# Altium PCB ATMEGA8精品开发板.PcbDoc (part 1 of 2)
Units mm, origin at the board's own origin, x right, y up, seen from the top; angles counter-clockwise.
Board outline 152.4 x 101.6 mm, 2 copper layers (Top Layer, Bottom Layer); 39 components, 43 nets, 177 pads, 0 vias.
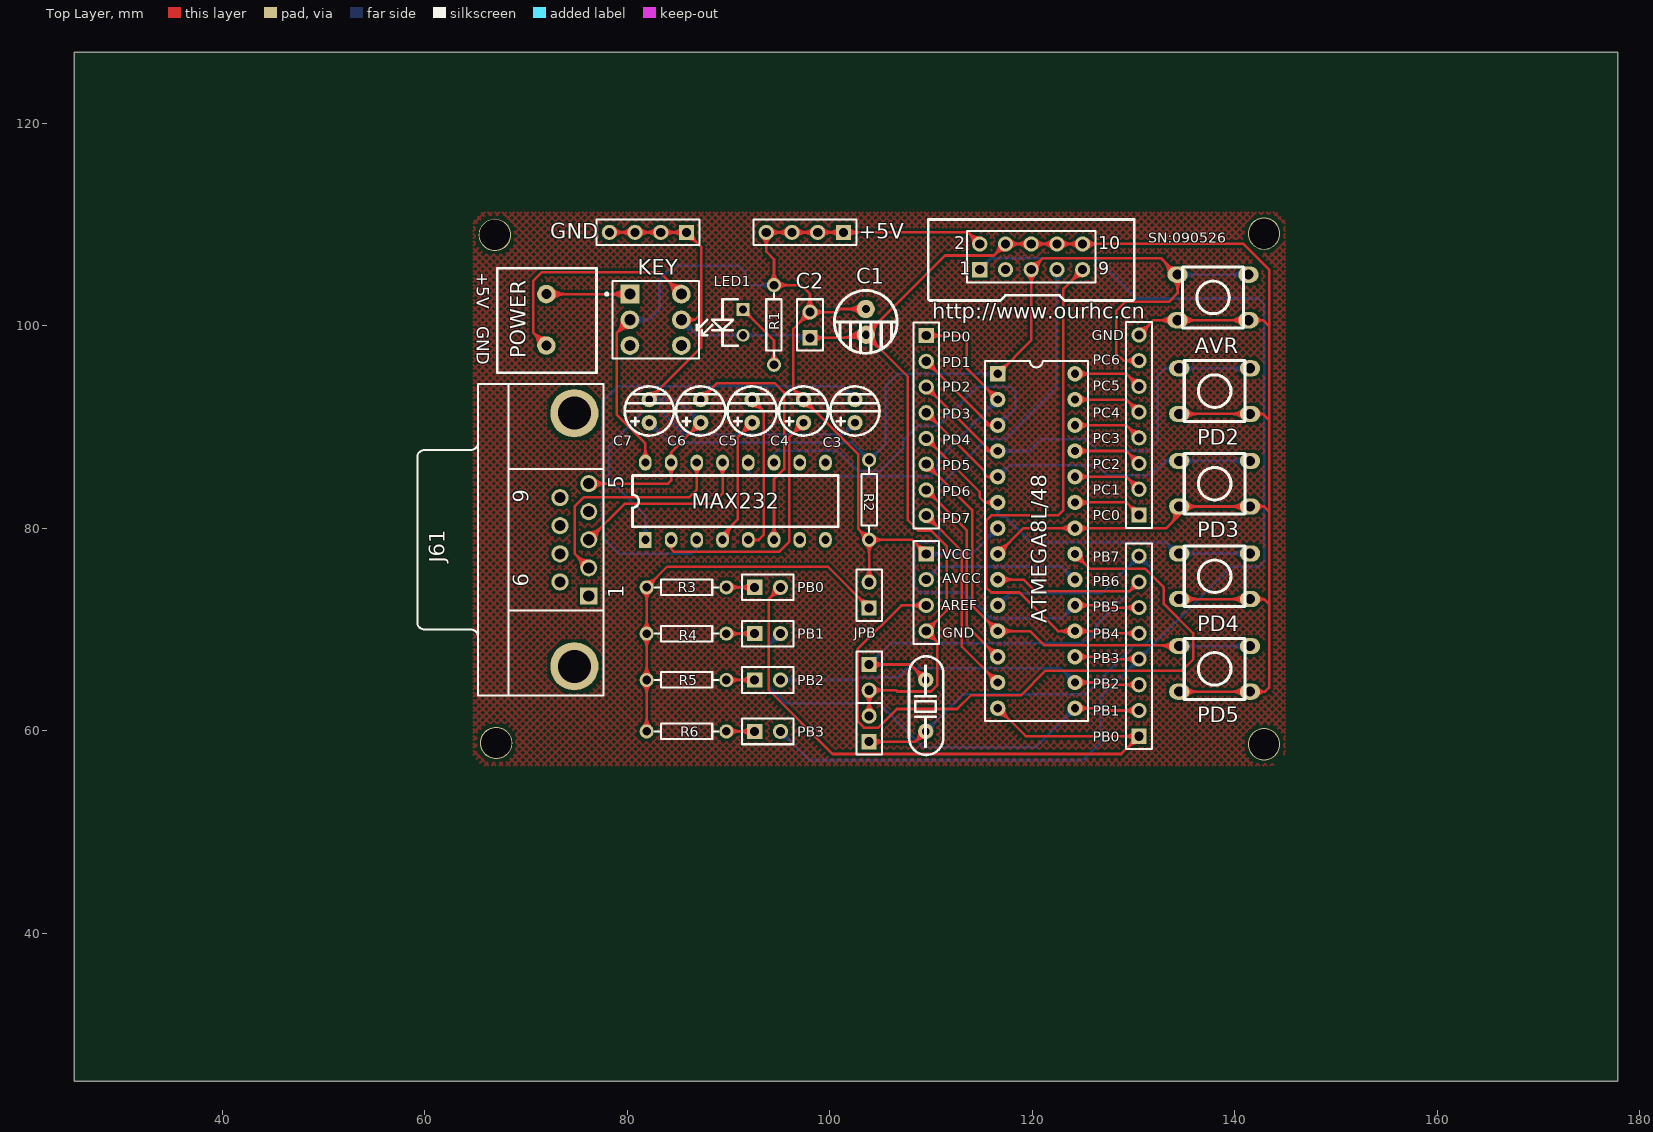
[diagram p0: Top Layer view]
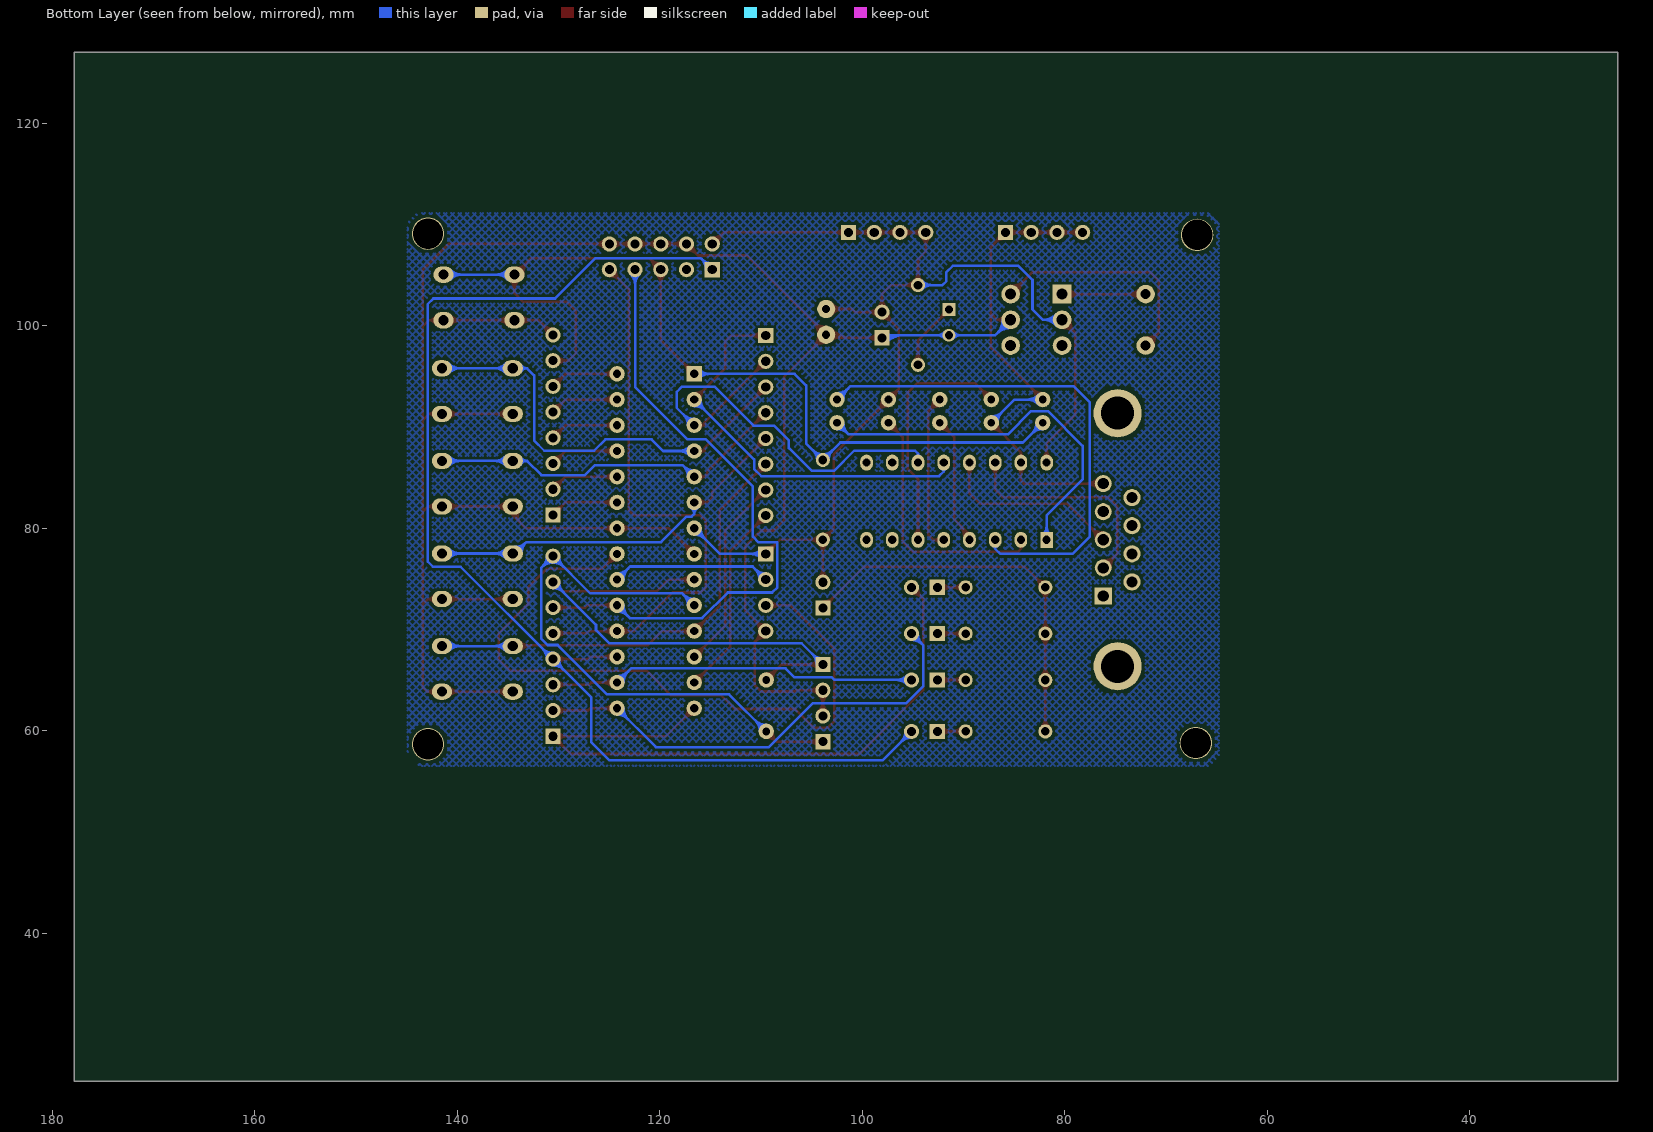
[diagram p1: Bottom Layer view, seen from below]

## Layer stack, top to bottom
Top Layer: signal copper 0.0356
Dielectric: dielectric 0.32, FR-4, Dk 4.8
Bottom Layer: signal copper 0.0356

## Board outline
25.4,25.4 177.8,25.4 177.8,127 25.4,127

## Design rules (kind name [scope] priority, off if disabled: settings)
Clearance [All] p1: gap=0.254
ComponentClearance [All] p1: gap=0.254 collisioncheckmode=3 verticalgap=0.254
PolygonConnect [All] p1: connectstyle=Relief reliefconductorwidth=0.254 reliefentries=4 polygonreliefangle="90 Angle"
RoutingVias [All] p1: holewidth=0.711 width=1.27 viastyle="Through Hole" minholewidth=0.711 minwidth=1.27 maxholewidth=0.711 maxwidth=1.27
SolderMaskExpansion [All] p1: expansion=0.102
TestPointUsage [All] p1: valid=0 allowmultiple=FALSE
Testpoint [All] p1: side=15 testpointundercomponent=TRUE minsize=1.016 maxsize=2.54 preferedsize=1.524 minholesize=0 maxholesize=1.016 preferedholesize=0.813 testpointgrid=0.025 style=1023 order=0123456789
Width [All] p1: maxlimit=0.254 minlimit=0.254 preferedwidth=0.254
17 further rules are at their usual default settings.

## Classes and differential pairs
component class ATMEGA8精品开发板: +5V AVR C1 C2 C3 C4 C5 C6 C7 JPB

## Components (designator, comment, footprint, x,y, rotation, side; value= is the part's Value field where it differs from the comment)
+5V "" HDR1X4 101.346,109.22 r180 top
ATMEGA8L/48 "ATmega8" 底座DIP-28/引脚7.62mm 120.396,78.74 r270 top (schematic designator U1)
AVR "" an-6*6 144.018,97.663 r0 top
C1 "100uF\25v" C-DJ-6 103.632,99.06 r270 top
C2 "CPDR" CPDR 98.044,100.076 r90 top
C3 "10uf" C-DJ-4 105.029,92.837 r90 top
C4 "10uf" C-DJ-4 99.949,92.837 r90 top
C5 "10uf" C-DJ-4 94.869,92.837 r90 top
C6 "10uf" C-DJ-4 89.789,92.837 r90 top
C7 "10uf" C-DJ-4 84.709,92.837 r90 top
CX1 "30p" HDR1X2 103.886,58.928 r90 top
CX2 "30p" HDR1X2 103.886,66.548 r270 top
GND "" HDR1X4 85.852,109.22 r180 top
J61 "D Connector 9" DSUB1.385-2H9 65.278,78.867 r90 top
JPB "" HDR1X2 103.886,72.136 r90 top (schematic designator JPB0~B3)
KEY "SW-DPST" DPDT-6 82.804,100.584 r0 top
LED1 "LED" LED 90.932,99.568 r90 top
MAX232 "MAX232" DIP16 81.788,78.867 r90 top (schematic designator U2)
PB "" HDR-8 130.556,72.136 r90 top
PB0 "LED" HDR1X2 92.583,74.168 r0 top
PB1 "LED" HDR1X2 92.583,69.596 r0 top
PB2 "LED" HDR1X2 92.583,65.024 r0 top
PB3 "LED" HDR1X2 92.583,59.944 r0 top
PC "" HDR-8 130.556,93.98 r90 top
PD "" HDR-8 109.503,86.36 r270 top
PD2 "key1" an-6*6 131.826,98.679 r180 top
PD3 "key2" an-6*6 131.826,89.535 r180 top
PD4 "key3" an-6*6 131.826,80.391 r180 top
PD5 "key4" an-6*6 131.826,71.247 r180 top
POWER "" JK128 73.152,102.616 r0 top
Px "" HDR-4 108.204,71.12 r270 top
R1 "4.7k" RSE 94.488,100.076 r270 top
R2 "10k" RSE 103.886,82.804 r270 top
R3 "470" RSE 85.852,74.168 r0 top
R4 "470" RSE 85.852,69.596 r0 top
R5 "470" RSE 85.852,65.024 r0 top
R6 "470" RSE 85.852,59.944 r0 top
Y "Y" JZ_ZC 109.474,65.024 r90 top
? "Download" HDR-2x5 119.888,105.664 r0 top

## Footprints (in the part's own frame and the unit in brackets; to place one, negate y for a bottom-side part, rotate by r counter-clockwise, add the part's x,y. Pads: shape width x height; smd on the part's side, far side on the other; paste and mask are expansions set on the pad)
an-6*6 [mm] "按键"
  oval 2x1.6 hole 1: 1(-9.675,7.381) 1(-2.675,7.381) 2(-9.675,2.881) 2(-2.675,2.881)
  silkscreen extent -9.17,2.13 -3.17,8.13
C-DJ-4 [mil]
  round 60 hole 30: 1(-95,100) 2(-5,100)
  silkscreen extent -145,4 46,195
C-DJ-6 [mm]
  round 1.8 hole 0.8: 1(-2.591,-0.076) 2(-0.051,-0.076)
  silkscreen extent -4.42,-3.18 1.78,3.02
CPDR [mm] "瓷片电容"
  rect 1.5x1.5 hole 0.9: 1(-1.27,0)
  round 1.5 hole 0.9: 2(1.27,0)
  silkscreen extent -2.54,-1.27 2.54,1.27
DIP16 [mil]
  rect 62x49.21 hole 32: 1(-0.15,-0.04)
  oval 62x49.21 hole 32: 2(-0.15,-100.04) 3(-0.15,-200.04) 4(-0.15,-300.04) 5(-0.15,-400.04) 6(-0.15,-500.04) 7(-0.15,-600.04) 8(-0.15,-700.04) 9(299.85,-700.04) 10(299.85,-600.04) 11(299.85,-500.04) 12(299.85,-400.04) 13(299.85,-300.04) 14(299.85,-200.04) 15(299.85,-100.04) 16(299.85,-0.04)
  silkscreen extent 50,-750 250,50
DPDT-6 [mm] "Double-Pole, Double-Throw Switch; 6 Leads"
  rect 1.85x1.85 hole 1.1: 1(-2.54,2.54)
  round 1.85 hole 1.1: 2(-2.54,0) 3(-2.54,-2.54) 4(2.54,-2.54) 5(2.54,0) 6(2.54,2.54)
  silkscreen extent -4.96,-3.81 4.28,3.81
DSUB1.385-2H9 [mm] "Connector; D Subminiature; 9 Position; Right Angle; Pitch 1.385 mm"
  rect 1.69x1.69 hole 1.09: 1(-5.54,-10.92)
  round 1.69 hole 1.09: 2(-2.77,-10.92) 3(0,-10.92) 4(2.77,-10.92) 5(5.54,-10.92) 6(-4.155,-8.08) 7(-1.385,-8.08) 8(1.385,-8.08) 9(4.155,-8.08)
  round 4.76 hole 3.26: 10(-12.495,-9.5) 11(12.495,-9.5)
  silkscreen extent -15.4,-12.4 15.4,6
HDR1X2 [mm] "Connector; Header; 2 Position"
  rect 1.5x1.5 hole 0.9: 1(0,0)
  round 1.5 hole 0.9: 2(2.54,0)
  silkscreen extent -1.27,-1.27 3.81,1.27
HDR1X4 [mm] "Connector; Header; 4 Position"
  rect 1.5x1.5 hole 0.9: 1(0,0)
  round 1.5 hole 0.9: 2(2.54,0) 3(5.08,0) 4(7.62,0)
  silkscreen extent -1.27,-1.27 8.89,1.27
HDR-2x5 [mm]
  rect 1.5x1.5 hole 0.9: 1(-5.08,-0.127)
  round 1.5 hole 0.9: 2(-5.08,2.413) 3(-2.54,-0.127) 4(-2.54,2.413) 5(0,-0.127) 6(0,2.413) 7(2.54,-0.127) 8(2.54,2.413) 9(5.08,-0.127) 10(5.08,2.413)
  silkscreen extent -10.16,-3.17 10.16,4.83
HDR-4 [mm]
  rect 1.5x1.5 hole 0.9: 1(-6.35,1.322)
  round 1.5 hole 0.9: 2(-3.81,1.322) 3(-1.27,1.322) 4(1.27,1.322)
  silkscreen extent -7.62,0.05 2.54,2.59
HDR-8 [mm]
  rect 1.5x1.5 hole 0.9: 1(-12.669,0.023)
  round 1.5 hole 0.9: 2(-10.129,0.023) 3(-7.589,0.023) 4(-5.049,0.023) 5(-2.509,0.023) 6(0.031,0.023) 7(2.571,0.023) 8(5.111,0.023)
  silkscreen extent -13.94,-1.25 6.38,1.29
JK128 [mil]
  round 71.81 hole 39.37: 1(-45,20) 2(-45,-180)
  silkscreen extent -235,-285 150,120
JZ_ZC [mil] "晶振"
  round 60 hole 30: 1(-200,0) 2(0,0)
  silkscreen extent -292,-68 92,65
LED [mil]
  rect 50x50 hole 32: 1(80,-20)
  round 50 hole 32: 2(-20,-20)
  silkscreen extent -60,0 120,160
RSE [mm] "直插电阻1/8W"
  round 1.4 hole 0.85: 1(-3.937,0) 2(3.937,0)
  silkscreen extent -3.17,-0.76 3.17,0.76
底座DIP-28/引脚7.62mm [mil] "引脚跨度 ：300 Mil ，主体外形 10.1×35.5mm（400×1400Mil）"
  rect 60x60 hole 32: 1(-650,-150)
  round 60 hole 32: 2(-550,-150) 3(-450,-150) 4(-350,-150) 5(-250,-150) 6(-150,-150) 7(-50,-150) 8(50,-150) 9(150,-150) 10(250,-150) 11(350,-150) 12(450,-150) 13(550,-150) 14(650,-150) 15(650,150) 16(550,150) 17(450,150) 18(350,150) 19(250,150) 20(150,150) 21(50,150) 22(-50,150) 23(-150,150) 24(-250,150) 25(-350,150) 26(-450,150) 27(-550,150) 28(-650,150)
  silkscreen extent -700,-200 700,200

## Part data
+5V GND: library part "Header 4", "Header, 4-Pin"
ATMEGA8L/48: library part ATmega8-P, "8 位微处理器/28引脚"
AVR: library part SW-PB, "Switch"
C1 C3 C4 C5 C6 C7: library part "CAPACITOR POL", "Capacitor"
C2: "瓷片电容"
CX1 CX2: library part CAP, "Capacitor"
J61: "Receptacle Assembly, 9 Position, Right Angle"
JPB POWER: library part "Header 2", "Header, 2-Pin"
KEY: "Double-Pole, Single-Throw Switch"
PB PC PD: library part PZ_8, "排针——8"
PD2 PD3 PD4 PD5: library part key
Px: library part PZ_4, "排针——4"
R1 R2 R3 R4 R5 R6: library part RES2
Y: library part CRYSTAL, "Crystal"
?: library part "Header 5X2", "Header, 5-Pin, Dual row"

## Free pads (board coordinates)
  round 3.2 hole 3: 0(66.929,108.966) 0(67.056,58.801) 0(142.875,58.674) 0(142.875,109.093)

## Nets (pads, with @x,y where several pads share a name; then routed paths per layer and width w, separated by ;. In a path a pad name is that pad's centre, name@x,y a point inside that pad or via, vN(x,y) a via of type N, cw(c..) or ccw(c..) an arc to the next point about the centre after c; other vN are vias at no path point)
AREF: ATMEGA8L/48.21 Px.3 | length 78
  Top Layer w0.254: Px.3@109.085,71.949 ccw(c108.022,70.886) 108.022,72.39 ccw(c108.022,73.894) Px.3@109.085,72.831 ; Px.3@109.265,72.129 ccw(c108.635,71.499) 108.635,72.39 ccw(c108.635,73.281) Px.3@109.265,72.651 ; Px.3@109.526,72.39 107.061,72.39 102.743,68.072 102.743,60.96 103.378,60.325 104.8,60.325 106.629,62.154 112.573,62.154 113.919,63.5 118.872,63.5 121.31,65.938 134.772,65.938 135.89,67.056 135.89,69.621 132.994,72.517 132.994,74.168 131.166,75.997 125.679,75.997 ATMEGA8L/48.21@124.206,77.47 ; ATMEGA8L/48.21@124.206,76.835 cw(c124.206,75.302) 125.29,76.386 cw(c126.374,77.47) ATMEGA8L/48.21@124.841,77.47 ; ATMEGA8L/48.21@124.206,77.089 cw(c124.206,76.169) 124.856,76.82 cw(c125.507,77.47) ATMEGA8L/48.21@124.587,77.47
AVCC: ATMEGA8L/48.20 Px.2 | length 23.4
  Bottom Layer w0.254: Px.2@109.526,74.93 110.821,76.225 122.911,76.225 ATMEGA8L/48.20@124.206,74.93 ; Px.2@109.526,75.299 ccw(c109.526,76.19) 110.156,75.56 ccw(c110.786,74.93) Px.2@109.895,74.93 ; Px.2@109.526,75.553 ccw(c109.526,77.057) 110.59,75.994 ccw(c111.653,74.93) Px.2@110.149,74.93 ; ATMEGA8L/48.20@123.571,74.93 ccw(c122.038,74.93) 123.122,76.014 ccw(c124.206,77.098) ATMEGA8L/48.20@124.206,75.565 ; ATMEGA8L/48.20@123.825,74.93 ccw(c122.905,74.93) 123.556,75.58 ccw(c124.206,76.231) ATMEGA8L/48.20@124.206,75.311
GND: ?.4 ?.6 ?.8 ?.10 ATMEGA8L/48.8 ATMEGA8L/48.22 AVR.2 C1.2 C2.1 C6.1 C7.2 CX1.2 CX2.2 GND.1 GND.2 GND.3 GND.4 J61.5 KEY.5 LED1.2 MAX232.15 PC.8 PD2.1 PD3.1 PD4.1 PD5.1 Px.4 | length 484
  Top Layer w0.254: J61.5@76.198,84.407 84.026,84.407 84.329,84.71 MAX232.15@84.329,86.483 84.329,87.504 ; J61.5@76.526,84.079 cw(c77.318,83.287) 77.318,84.407 cw(c77.318,85.527) J61.5@76.526,84.735 ; J61.5@76.706,83.899 cw(c77.931,82.674) 77.931,84.407 cw(c77.931,86.14) J61.5@76.706,84.915 ; GND.4@78.232,109.22 GND.3@80.772,109.22 GND.2@83.312,109.22 GND.1@85.852,109.22 87.3,107.772 87.3,97.841 C7.2@82.169,92.71 ; GND.4@78.493,108.959 cw(c79.123,108.329) 79.123,109.22 cw(c79.123,110.111) GND.4@78.493,109.481 ; GND.4@78.673,108.779 cw(c79.736,107.716) 79.736,109.22 cw(c79.736,110.724) GND.4@78.673,109.661 ; GND.3@80.331,108.779 ccw(c79.268,107.716) 79.268,109.22 ccw(c79.268,110.724) GND.3@80.331,109.661 ; GND.3@80.511,108.959 ccw(c79.881,108.329) 79.881,109.22 ccw(c79.881,110.111) GND.3@80.511,109.481 ; GND.3@81.033,108.959 cw(c81.663,108.329) 81.663,109.22 cw(c81.663,110.111) GND.3@81.033,109.481 ; GND.3@81.213,108.779 cw(c82.276,107.716) 82.276,109.22 cw(c82.276,110.724) GND.3@81.213,109.661 ; C7.2@82.169,93.091 ccw(c82.169,94.011) 82.819,93.36 ccw(c83.47,92.71) C7.2@82.55,92.71 ; C7.2@82.169,93.345 ccw(c82.169,94.878) 83.253,93.794 ccw(c84.337,92.71) C7.2@82.804,92.71 ; GND.2@82.871,108.779 ccw(c81.808,107.716) 81.808,109.22 ccw(c81.808,110.724) GND.2@82.871,109.661 ; GND.2@83.051,108.959 ccw(c82.421,108.329) 82.421,109.22 ccw(c82.421,110.111) GND.2@83.051,109.481 ; GND.2@83.573,108.959 cw(c84.203,108.329) 84.203,109.22 cw(c84.203,110.111) GND.2@83.573,109.481 ; GND.2@83.753,108.779 cw(c84.816,107.716) 84.816,109.22 cw(c84.816,110.724) GND.2@83.753,109.661 ; MAX232.15@83.977,85.969 cw(c83.127,85.119) 84.329,85.119 cw(c85.531,85.119) MAX232.15@84.681,85.969 ; MAX232.15@84.082,87.078 ccw(c83.838,87.504) 84.329,87.504 ; MAX232.15@84.576,87.078 cw(c84.82,87.504) 84.329,87.504 ; KEY.5@85.344,100.584 86.665,100.584 ; GND.1@85.411,108.779 ccw(c84.348,107.716) 84.348,109.22 ccw(c84.348,110.724) GND.1@85.411,109.661 ; GND.1@85.591,108.959 ccw(c84.961,108.329) 84.961,109.22 ccw(c84.961,110.111) GND.1@85.591,109.481 ; GND.1@85.852,108.597 cw(c85.852,107.093) 86.916,108.156 cw(c87.979,109.22) GND.1@86.475,109.22 ; GND.1@85.852,108.851 cw(c85.852,107.96) 86.482,108.59 cw(c87.112,109.22) GND.1@86.221,109.22 ; KEY.5@86.05,100.213 cw(c86.665,99.89) 86.665,100.584 ; KEY.5@86.05,100.955 ccw(c86.665,101.278) 86.665,100.584 ; C6.1@86.614,90.424 cw(c85.081,90.424) 86.165,89.34 cw(c87.249,88.256) C6.1@87.249,89.789 ; C6.1@86.868,90.424 cw(c85.948,90.424) 86.599,89.774 cw(c87.249,89.123) C6.1@87.249,90.043 ; C6.1@87.249,90.424 84.329,87.504 ; 87.3,101.219 86.665,100.584 ; C2.1@98.044,98.806 103.251,98.806 111.379,106.934 116.205,106.934 ?.4@117.348,108.077 ?.6@119.888,108.077 ?.8@122.428,108.077 ?.10@124.968,108.077 140.843,108.077 143.383,105.537 143.383,99.949 ; C2.1@98.305,98.545 cw(c98.935,97.915) 98.935,98.806 cw(c98.935,99.697) C2.1@98.305,99.067 ; C2.1@98.485,98.365 cw(c99.548,97.302) 99.548,98.806 cw(c99.548,100.31) C2.1@98.485,99.247 ; 100.954,98.806 ccw(c100.954,101.713) C1.2@103.009,99.657 ; 101.567,98.806 ccw(c101.567,101.1) C1.2@103.189,99.478 ; 102.18,98.806 ccw(c102.18,100.486) C1.2@103.368,99.298 ; 102.425,98.806 cw(c102.425,97.98) C1.2@103.009,98.564 ; CX1.2@103.445,61.909 ccw(c102.382,62.972) 103.886,62.972 ccw(c105.39,62.972) CX1.2@104.327,61.909 ; CX2.2@103.445,63.567 cw(c102.382,62.504) 103.886,62.504 cw(c105.39,62.504) 104.327,63.567 cw(c105.39,62.504) 105.39,64.008 cw(c105.39,65.512) CX2.2@104.327,64.449 ; C1.2@103.556,98.338 cw(c103.556,96.472) 104.875,97.791 cw(c106.195,99.111) 104.329,99.111 cw(c106.195,99.111) 104.875,100.43 cw(c103.556,101.75) C1.2@103.556,99.884 ; C1.2@103.556,98.592 cw(c103.556,97.339) 104.442,98.225 cw(c105.328,99.111) 104.075,99.111 cw(c105.328,99.111) 104.442,99.997 cw(c103.556,100.883) C1.2@103.556,99.63 ; C1.2@103.556,99.111 107.696,94.971 107.696,80.797 108.712,79.781 109.982,79.781 111.531,78.232 111.531,71.855 Px.4@109.526,69.85 110.617,68.759 110.617,64.516 109.982,63.881 106.68,63.881 106.553,64.008 CX2.2@103.886,64.008 CX1.2@103.886,61.468 ; CX1.2@103.625,61.729 ccw(c102.995,62.359) 103.886,62.359 ccw(c104.777,62.359) CX1.2@104.147,61.729 ; CX2.2@103.625,63.747 cw(c102.995,63.117) 103.886,63.117 cw(c104.777,63.117) 104.147,63.747 cw(c104.777,63.117) 104.777,64.008 cw(c104.777,64.899) CX2.2@104.147,64.269 ; Px.4@109.526,69.227 cw(c109.526,67.723) 110.59,68.786 cw(c111.653,69.85) 110.149,69.85 cw(c111.653,69.85) 110.59,70.914 cw(c109.526,71.977) Px.4@109.526,70.473 ; Px.4@109.526,69.481 cw(c109.526,68.59) 110.156,69.22 cw(c110.786,69.85) 109.895,69.85 cw(c110.786,69.85) 110.156,70.48 cw(c109.526,71.11) Px.4@109.526,70.219 ; ATMEGA8L/48.8@116.586,77.47 119.126,80.01 ATMEGA8L/48.22@124.206,80.01 133.231,80.01 134.501,81.28 ; ATMEGA8L/48.8@116.586,77.851 ccw(c116.586,78.771) 117.236,78.12 ccw(c117.887,77.47) ATMEGA8L/48.8@116.967,77.47 ; ATMEGA8L/48.8@116.586,78.105 ccw(c116.586,79.638) 117.67,78.554 ccw(c118.754,77.47) ATMEGA8L/48.8@117.221,77.47 ; ?.4@116.725,108.077 cw(c115.221,108.077) 116.284,107.013 cw(c117.348,105.95) ?.4@117.348,107.454 ; ?.4@116.979,108.077 cw(c116.088,108.077) 116.718,107.447 cw(c117.348,106.817) ?.4@117.348,107.708 ; ?.4@117.609,107.816 cw(c118.239,107.186) 118.239,108.077 cw(c118.239,108.968) ?.4@117.609,108.338 ; ?.4@117.789,107.636 cw(c118.852,106.573) 118.852,108.077 cw(c118.852,109.581) ?.4@117.789,108.518 ; ?.6@119.447,107.636 ccw(c118.384,106.573) 118.384,108.077 ccw(c118.384,109.581) ?.6@119.447,108.518 ; ?.6@119.627,107.816 ccw(c118.997,107.186) 118.997,108.077 ccw(c118.997,108.968) ?.6@119.627,108.338 ; ?.6@120.149,107.816 cw(c120.779,107.186) 120.779,108.077 cw(c120.779,108.968) ?.6@120.149,108.338 ; ?.6@120.329,107.636 cw(c121.392,106.573) 121.392,108.077 cw(c121.392,109.581) ?.6@120.329,108.518 ; ?.8@121.987,107.636 ccw(c120.924,106.573) 120.924,108.077 ccw(c120.924,109.581) ?.8@121.987,108.518 ; ?.8@122.167,107.816 ccw(c121.537,107.186) 121.537,108.077 ccw(c121.537,108.968) ?.8@122.167,108.338 ; ?.8@122.689,107.816 cw(c123.319,107.186) 123.319,108.077 cw(c123.319,108.968) ?.8@122.689,108.338 ; ?.8@122.869,107.636 cw(c123.932,106.573) 123.932,108.077 cw(c123.932,109.581) ?.8@122.869,108.518 ; ATMEGA8L/48.22@123.757,79.561 ccw(c122.673,78.477) 122.673,80.01 ccw(c122.673,81.543) ATMEGA8L/48.22@123.757,80.459 ; ATMEGA8L/48.22@123.937,79.741 ccw(c123.286,79.09) 123.286,80.01 ccw(c123.286,80.93) ATMEGA8L/48.22@123.937,80.279 ; ATMEGA8L/48.22@124.475,79.741 cw(c125.126,79.09) 125.126,80.01 cw(c125.126,80.93) ATMEGA8L/48.22@124.475,80.279 ; ?.10@124.527,107.636 ccw(c123.464,106.573) 123.464,108.077 ccw(c123.464,109.581) ?.10@124.527,108.518 ; ATMEGA8L/48.22@124.655,79.561 cw(c125.739,78.477) 125.739,80.01 cw(c125.739,81.543) ATMEGA8L/48.22@124.655,80.459 ; ?.10@124.707,107.816 ccw(c124.077,107.186) 124.077,108.077 ccw(c124.077,108.968) ?.10@124.707,108.338 ; ?.10@125.229,107.816 cw(c125.859,107.186) 125.859,108.077 cw(c125.859,108.968) ?.10@125.229,108.338 ; ?.10@125.409,107.636 cw(c126.472,106.573) 126.472,108.077 cw(c126.472,109.581) ?.10@125.409,108.518 ; PC.8@130.533,99.091 131.986,100.544 AVR.2@134.343,100.544 AVR.2@141.343,100.544 142.788,100.544 ; PC.8@130.533,99.46 ccw(c130.533,100.351) 131.163,99.721 ccw(c131.793,99.091) PC.8@130.902,99.091 ; PC.8@130.533,99.714 ccw(c130.533,101.218) 131.597,100.155 ccw(c132.66,99.091) PC.8@131.156,99.091 ; AVR.2@133.667,100.068 ccw(c132.518,98.919) 132.518,100.544 ccw(c132.518,102.169) AVR.2@133.667,101.02 ; 133.768,80.547 ccw(c133.172,81.143) PD3.1@133.8,81.705 ; AVR.2@133.847,100.248 ccw(c133.131,99.532) 133.131,100.544 ccw(c133.131,101.555) AVR.2@133.847,100.84 ; 133.958,80.737 ccw(c133.373,81.322) PD3.1@133.989,81.875 ; 134.148,80.927 ccw(c133.573,81.501) PD3.1@134.178,82.044 ; PD3.1@134.329,81.504 cw(c134.27,81.28) 134.501,81.28 ; 134.337,81.116 ccw(c133.773,81.681) PD3.1@134.367,82.214 ; PD5.1@134.501,63.866 PD5.1@141.501,63.866 142.987,63.866 ; PD4.1@134.501,73.01 PD4.1@141.501,73.01 142.89,73.01 ; PD2.1@134.501,91.298 PD2.1@141.501,91.298 142.763,91.298 ; 134.527,81.306 ccw(c133.973,81.86) PD3.1@134.556,82.383 ; PD3.1@134.673,81.504 ccw(c134.732,81.28) 134.501,81.28 ; AVR.2@134.839,100.248 cw(c135.555,99.532) 135.555,100.544 cw(c135.555,101.555) AVR.2@134.839,100.84 ; PD5.1@134.997,63.57 cw(c135.713,62.855) 135.713,63.866 cw(c135.713,64.878) PD5.1@134.997,64.162 ; PD4.1@134.997,72.714 cw(c135.713,71.999) 135.713,73.01 cw(c135.713,74.022) PD4.1@134.997,73.306 ; PD3.1@134.997,81.858 cw(c135.713,81.143) 135.713,82.154 cw(c135.713,83.166) PD3.1@134.997,82.45 ; PD2.1@134.997,91.002 cw(c135.713,90.287) 135.713,91.298 cw(c135.713,92.31) PD2.1@134.997,91.594 ; AVR.2@135.019,100.068 cw(c136.168,98.919) 136.168,100.544 cw(c136.168,102.169) AVR.2@135.019,101.02 ; PD5.1@135.177,63.39 cw(c136.326,62.241) 136.326,63.866 cw(c136.326,65.491) PD5.1@135.177,64.342 ; PD4.1@135.177,72.534 cw(c136.326,71.385) 136.326,73.01 cw(c136.326,74.635) PD4.1@135.177,73.486 ; PD3.1@135.177,81.678 cw(c136.326,80.529) 136.326,82.154 cw(c136.326,83.779) PD3.1@135.177,82.63 ; PD2.1@135.177,90.822 cw(c136.326,89.673) 136.326,91.298 cw(c136.326,92.923) PD2.1@135.177,91.774 ; AVR.2@140.667,100.068 ccw(c139.518,98.919) 139.518,100.544 ccw(c139.518,102.169) AVR.2@140.667,101.02 ; PD5.1@140.825,63.39 ccw(c139.676,62.241) 139.676,63.866 ccw(c139.676,65.491) PD5.1@140.825,64.342 ; PD4.1@140.825,72.534 ccw(c139.676,71.385) 139.676,73.01 ccw(c139.676,74.635) PD4.1@140.825,73.486 ; PD3.1@140.825,81.678 ccw(c139.676,80.529) 139.676,82.154 ccw(c139.676,83.779) PD3.1@140.825,82.63 ; PD2.1@140.825,90.822 ccw(c139.676,89.673) 139.676,91.298 ccw(c139.676,92.923) PD2.1@140.825,91.774 ; AVR.2@140.847,100.248 ccw(c140.131,99.532) 140.131,100.544 ccw(c140.131,101.555) AVR.2@140.847,100.84 ; PD5.1@141.005,63.57 ccw(c140.289,62.855) 140.289,63.866 ccw(c140.289,64.878) PD5.1@141.005,64.162 ; PD4.1@141.005,72.714 ccw(c140.289,71.999) 140.289,73.01 ccw(c140.289,74.022) PD4.1@141.005,73.306 ; PD3.1@141.005,81.858 ccw(c140.289,81.143) 140.289,82.154 ccw(c140.289,83.166) PD3.1@141.005,82.45 ; PD2.1@141.005,91.002 ccw(c140.289,90.287) 140.289,91.298 ccw(c140.289,92.31) PD2.1@141.005,91.594 ; PD5.1@142.045,63.627 cw(c142.502,63.311) 142.502,63.866 cw(c142.502,64.422) PD5.1@142.045,64.105 ; AVR.2@142.106,100.175 cw(c142.788,99.729) 142.788,100.544 ; AVR.2@142.106,100.912 ccw(c142.788,101.359) 142.788,100.544 ; PD5.1@142.254,63.483 cw(c142.987,62.974) 142.987,63.866 ; PD5.1@142.254,64.25 ccw(c142.987,64.759) 142.987,63.866 ; PD4.1@142.278,72.664 cw(c142.89,72.297) 142.89,73.01 ; PD4.1@142.278,73.357 ccw(c142.89,73.724) 142.89,73.01 ; PD3.1@142.278,81.808 cw(c142.89,81.441) 142.89,82.154 ; PD3.1@142.278,82.501 ccw(c142.89,82.868) 142.89,82.154 ; PD2.1@142.31,91.011 cw(c142.763,90.797) 142.763,91.298 ; PD2.1@142.31,91.585 ccw(c142.763,91.799) 142.763,91.298 ; 134.501,81.28 PD3.1@134.501,82.154 PD3.1@141.501,82.154 142.89,82.154 ; 142.763,91.298 143.383,90.678 ; 142.788,100.544 143.383,99.949 ; 142.89,73.01 143.383,72.517 ; 142.89,82.154 143.383,81.661 ; 142.987,63.866 143.383,64.262 143.383,72.517 ; 143.383,72.517 143.383,81.661 ; 143.383,81.661 143.383,90.678 ; 143.383,90.678 143.383,99.949
  Bottom Layer w0.254: C7.2@82.169,92.71 84.963,92.71 C6.1@87.249,90.424 ; C7.2@82.438,92.441 cw(c83.089,91.79) 83.089,92.71 cw(c83.089,93.63) C7.2@82.438,92.979 ; C7.2@82.618,92.261 cw(c83.702,91.177) 83.702,92.71 cw(c83.702,94.243) C7.2@82.618,93.159 ; KEY.5@85.344,99.786 cw(c85.344,97.859) 86.706,99.222 cw(c88.069,100.584) KEY.5@86.142,100.584 ; KEY.5@85.344,100.04 cw(c85.344,98.727) 86.273,99.655 cw(c87.201,100.584) KEY.5@85.888,100.584 ; KEY.5@85.344,100.584 86.868,99.06 LED1.2@91.44,99.06 97.79,99.06 C2.1@98.044,98.806 ; C6.1@86.614,90.424 ccw(c85.081,90.424) 86.165,91.508 ccw(c87.249,92.592) C6.1@87.249,91.059 ; C6.1@86.868,90.424 ccw(c85.948,90.424) 86.599,91.074 ccw(c87.249,91.725) C6.1@87.249,90.805 ; LED1.2@91.081,98.701 ccw(c90.214,97.834) 90.214,99.06 ccw(c90.214,100.286) LED1.2@91.081,99.419 ; LED1.2@91.799,98.701 cw(c92.666,97.834) 92.666,99.06 cw(c92.666,100.286) LED1.2@91.799,99.419 ; 95.927,99.06 cw(c95.927,96.689) C2.1@97.603,98.365 ; 96.54,99.06 cw(c96.54,97.302) C2.1@97.783,98.545 ; C2.1@97.603,99.247 cw(c97.153,99.697) 97.153,99.06 cw(c97.153,97.915) C2.1@97.963,98.725
NetC3_1: C3.1 MAX232.1 | length 43.6
  Bottom Layer w0.254: MAX232.1@81.437,79.378 ccw(c80.587,80.228) 81.789,80.228 ccw(c82.991,80.228) MAX232.1@82.141,79.378 ; MAX232.1@81.789,78.863 81.789,81.28 78.232,84.837 78.232,88.138 81.661,91.567 83.312,91.567 85.598,89.281 101.346,89.281 C3.1@102.489,90.424 ; C3.1@101.854,90.424 cw(c100.321,90.424) 101.405,89.34 cw(c102.489,88.256) C3.1@102.489,89.789 ; C3.1@102.108,90.424 cw(c101.188,90.424) 101.839,89.774 cw(c102.489,89.123) C3.1@102.489,90.043
NetC3_2: C3.2 MAX232.3 | length 55.1
  Bottom Layer w0.254: MAX232.3@86.692,78.235 cw(c86.595,77.979) 86.869,77.979 ; MAX232.3@86.869,78.863 86.869,77.979 ; MAX232.3@87.046,78.235 ccw(c87.143,77.979) 86.869,77.979 ; C3.2@101.854,92.71 ccw(c100.321,92.71) 101.405,93.794 ccw(c102.489,94.878) C3.2@102.489,93.345 ; C3.2@102.108,92.71 ccw(c101.188,92.71) 101.839,93.36 ccw(c102.489,94.011) C3.2@102.489,93.091 ; C3.2@102.489,92.71 101.194,94.005 79.096,94.005 77.546,92.456 77.546,79.146 79.223,77.47 86.36,77.47 86.869,77.979
NetC4_1: C4.1 MAX232.2 | length 30.6
  Top Layer w0.254: MAX232.2@84.329,78.863 84.329,77.978 ; C4.1@96.774,90.424 cw(c95.241,90.424) 96.325,89.34 cw(c97.409,88.256) C4.1@97.409,89.789 ; C4.1@97.028,90.424 cw(c96.108,90.424) 96.759,89.774 cw(c97.409,89.123) C4.1@97.409,90.043 ; C4.1@97.409,90.424 96.003,89.018 96.003,78.68 94.996,77.673 84.634,77.673 84.329,77.978 ; 84.329,77.978 cw(c84.604,77.978) 84.506,78.235 ccw(c84.604,77.978) 84.329,77.978 ; 84.329,77.978 ccw(c84.054,77.978) 84.152,78.235 cw(c84.054,77.978) 84.329,77.978
NetC5_1: C5.1 MAX232.4 | length 20.3
  Top Layer w0.254: MAX232.4@89.399,79.026 cw(c90.221,79.026) 89.64,79.607 ; MAX232.4@89.409,78.863 89.409,79.376 90.932,80.899 90.932,89.027 C5.1@92.329,90.424 ; MAX232.4@89.409,79.524 ccw(c89.409,79.88) 89.661,79.628 ; MAX232.4@89.653,79.026 cw(c91.088,79.026) 90.073,80.04 ; MAX232.4@89.907,79.026 cw(c91.955,79.026) 90.507,80.474 ; C5.1@91.694,90.424 cw(c90.161,90.424) 91.245,89.34 cw(c92.329,88.256) C5.1@92.329,89.789 ; C5.1@91.948,90.424 cw(c91.028,90.424) 91.679,89.774 cw(c92.329,89.123) C5.1@92.329,90.043
NetC5_2: C5.2 MAX232.5 | length 20.9
  Top Layer w0.254: MAX232.5@91.949,78.863 91.949,78.842 92.964,78.842 ; C5.2@92.329,92.075 cw(c92.329,90.542) 93.413,91.626 cw(c94.497,92.71) C5.2@92.964,92.71 ; C5.2@92.329,92.329 cw(c92.329,91.409) 92.979,92.06 cw(c93.63,92.71) C5.2@92.71,92.71 ; C5.2@92.329,92.71 93.472,91.567 93.472,79.35 92.964,78.842 ; MAX232.5@92.332,78.545 cw(c92.964,78.02) 92.964,78.842 ; MAX232.5@92.353,79.154 ccw(c92.964,79.595) 92.964,78.842
NetC6_2: C6.2 MAX232.6 | length 30
  Top Layer w0.254: C6.2@87.249,92.71 88.875,94.336 94.564,94.336 95.495,93.405 95.495,85.852 94.489,84.846 MAX232.6@94.489,78.863 ; C6.2@87.249,93.091 ccw(c87.249,94.011) 87.899,93.36 ccw(c88.55,92.71) C6.2@87.63,92.71 ; C6.2@87.249,93.345 ccw(c87.249,94.878) 88.333,93.794 ccw(c89.417,92.71) C6.2@87.884,92.71 ; MAX232.6@94.137,79.378 ccw(c93.287,80.228) 94.489,80.228 ccw(c95.691,80.228) MAX232.6@94.841,79.378
NetJ61_2: J61.2 MAX232.14 | length 28.4
  Top Layer w0.254: J61.2@75.48,76.097 ccw(c73.747,76.097) 74.972,77.323 ccw(c76.198,78.548) J61.2@76.198,76.815 ; J61.2@75.734,76.097 ccw(c74.614,76.097) 75.406,76.889 ccw(c76.198,77.681) J61.2@76.198,76.561 ; J61.2@76.198,76.097 74.803,77.492 74.803,82.169 75.692,83.058 86.106,83.058 86.869,83.821 MAX232.14@86.869,86.483 ; MAX232.14@86.517,85.969 cw(c85.667,85.119) 86.869,85.119 cw(c88.071,85.119) MAX232.14@87.221,85.969
NetJ61_3: J61.3 MAX232.13 | length 24.5
  Top Layer w0.254: J61.3@76.198,78.867 79.755,82.424 88.392,82.424 89.409,83.441 MAX232.13@89.409,86.483 ; J61.3@76.198,79.331 ccw(c76.198,80.451) 76.99,79.659 ccw(c77.782,78.867) J61.3@76.662,78.867 ; J61.3@76.198,79.585 ccw(c76.198,81.318) 77.424,80.093 ccw(c78.649,78.867) J61.3@76.916,78.867 ; MAX232.13@89.057,85.969 cw(c88.207,85.119) 89.409,85.119 cw(c90.611,85.119) MAX232.13@89.761,85.969
NetJPB0~B3_1: JPB.1 R3.1 R4.1 R5.1 R6.1 | length 66.2
  Top Layer w0.254: R6.1@81.51,60.349 ccw(c80.532,61.327) 81.915,61.327 ccw(c83.298,61.327) R6.1@82.32,60.349 ; R5.1@81.51,64.619 cw(c80.532,63.641) 81.915,63.641 cw(c83.298,63.641) R5.1@82.32,64.619 ; R5.1@81.51,65.429 ccw(c80.532,66.407) 81.915,66.407 ccw(c83.298,66.407) R5.1@82.32,65.429 ; R4.1@81.51,69.191 cw(c80.532,68.213) 81.915,68.213 cw(c83.298,68.213) R4.1@82.32,69.191 ; R4.1@81.51,70.001 ccw(c80.532,70.979) 81.915,70.979 ccw(c83.298,70.979) R4.1@82.32,70.001 ; R3.1@81.51,73.763 cw(c80.532,72.785) 81.915,72.785 cw(c83.298,72.785) R3.1@82.32,73.763 ; R6.1@81.689,60.17 ccw(c81.145,60.714) 81.915,60.714 ccw(c82.685,60.714) R6.1@82.141,60.17 ; R5.1@81.689,64.798 cw(c81.145,64.254) 81.915,64.254 cw(c82.685,64.254) R5.1@82.141,64.798 ; R5.1@81.689,65.25 ccw(c81.145,65.794) 81.915,65.794 ccw(c82.685,65.794) R5.1@82.141,65.25 ; R4.1@81.689,69.37 cw(c81.145,68.826) 81.915,68.826 cw(c82.685,68.826) R4.1@82.141,69.37 ; R4.1@81.689,69.822 ccw(c81.145,70.366) 81.915,70.366 ccw(c82.685,70.366) R4.1@82.141,69.822 ; R3.1@81.689,73.942 cw(c81.145,73.398) 81.915,73.398 cw(c82.685,73.398) R3.1@82.141,73.942 ; R6.1@81.915,59.944 R5.1@81.915,65.024 R4.1@81.915,69.596 R3.1@81.915,74.168 83.947,76.2 99.822,76.2 JPB.1@103.886,72.136 ; R3.1@81.915,74.487 ccw(c81.915,75.257) 82.46,74.713 ccw(c83.004,74.168) R3.1@82.234,74.168 ; R3.1@81.915,74.741 ccw(c81.915,76.124) 82.893,75.146 ccw(c83.871,74.168) R3.1@82.488,74.168 ; JPB.1@103.263,72.136 ccw(c101.759,72.136) 102.822,73.2 ccw(c103.886,74.263) JPB.1@103.886,72.759 ; JPB.1@103.517,72.136 ccw(c102.626,72.136) 103.256,72.766 ccw(c103.886,73.396) JPB.1@103.886,72.505
NetKEY_1: KEY.1 POWER.1 | length 18.3
  Top Layer w0.254: POWER.1@72.009,103.124 KEY.1@80.264,103.124 ; POWER.1@72.384,102.749 cw(c73.291,101.842) 73.291,103.124 cw(c73.291,104.406) POWER.1@72.384,103.499 ; POWER.1@72.564,102.569 cw(c73.904,101.229) 73.904,103.124 cw(c73.904,105.019) POWER.1@72.564,103.679 ; KEY.1@79.7,102.56 ccw(c78.337,101.197) 78.337,103.124 ccw(c78.337,105.051) KEY.1@79.7,103.688 ; KEY.1@79.879,102.739 ccw(c78.951,101.811) 78.951,103.124 ccw(c78.951,104.437) KEY.1@79.879,103.509
NetKEY_6: KEY.6 POWER.2 | length 32.6
  Top Layer w0.254: POWER.2@71.224,98.063 ccw(c69.48,98.105) 70.714,99.339 ; POWER.2@71.478,98.057 ccw(c70.298,98.086) 71.133,98.92 ccw(c71.967,99.755) POWER.2@71.996,98.575 ; POWER.2@71.99,98.829 cw(c71.948,100.573) 70.714,99.339 ; POWER.2@72.009,98.044 70.714,99.339 ; KEY.6@84.546,103.124 ccw(c82.619,103.124) 83.982,104.486 ccw(c85.344,105.849) KEY.6@85.344,103.922 ; KEY.6@84.8,103.124 ccw(c83.487,103.124) 84.415,104.053 ccw(c85.344,104.981) KEY.6@85.344,103.668 ; KEY.6@85.344,103.124 83.185,105.283 71.577,105.283 70.714,104.419 70.714,99.339
NetLED1_1: LED1.1 R1.2 | length 12
  Top Layer w0.254: LED1.1@91.44,101.092 cw(c91.44,99.866) 92.307,100.733 cw(c93.174,101.6) LED1.1@91.948,101.6 ; LED1.1@91.44,101.6 94.488,98.552 R1.2@94.488,96.139 ; R1.2@94.083,96.544 ccw(c93.105,97.522) 94.488,97.522 ccw(c95.871,97.522) R1.2@94.893,96.544 ; R1.2@94.262,96.365 ccw(c93.718,96.909) 94.488,96.909 ccw(c95.258,96.909) R1.2@94.714,96.365
NetPB0_1: PB0.1 R3.2 | length 9.9
  Top Layer w0.254: R3.2@89.789,74.168 PB0.1@92.583,74.168 ; R3.2@90.015,73.942 cw(c90.559,73.398) 90.559,74.168 cw(c90.559,74.938) R3.2@90.015,74.394 ; R3.2@90.194,73.763 cw(c91.172,72.785) 91.172,74.168 cw(c91.172,75.551) R3.2@90.194,74.573 ; PB0.1@92.142,73.727 ccw(c91.079,72.664) 91.079,74.168 ccw(c91.079,75.672) PB0.1@92.142,74.609 ; PB0.1@92.322,73.907 ccw(c91.692,73.277) 91.692,74.168 ccw(c91.692,75.059) PB0.1@92.322,74.429
NetPB1_1: PB1.1 R4.2 | length 9.9
  Top Layer w0.254: R4.2@89.789,69.596 PB1.1@92.583,69.596 ; R4.2@90.015,69.37 cw(c90.559,68.826) 90.559,69.596 cw(c90.559,70.366) R4.2@90.015,69.822 ; R4.2@90.194,69.191 cw(c91.172,68.213) 91.172,69.596 cw(c91.172,70.979) R4.2@90.194,70.001 ; PB1.1@92.142,69.155 ccw(c91.079,68.092) 91.079,69.596 ccw(c91.079,71.1) PB1.1@92.142,70.037 ; PB1.1@92.322,69.335 ccw(c91.692,68.705) 91.692,69.596 ccw(c91.692,70.487) PB1.1@92.322,69.857
NetPB2_1: PB2.1 R5.2 | length 9.9
  Top Layer w0.254: R5.2@89.789,65.024 PB2.1@92.583,65.024 ; R5.2@90.015,64.798 cw(c90.559,64.254) 90.559,65.024 cw(c90.559,65.794) R5.2@90.015,65.25 ; R5.2@90.194,64.619 cw(c91.172,63.641) 91.172,65.024 cw(c91.172,66.407) R5.2@90.194,65.429 ; PB2.1@92.142,64.583 ccw(c91.079,63.52) 91.079,65.024 ccw(c91.079,66.528) PB2.1@92.142,65.465 ; PB2.1@92.322,64.763 ccw(c91.692,64.133) 91.692,65.024 ccw(c91.692,65.915) PB2.1@92.322,65.285
NetPB3_1: PB3.1 R6.2 | length 9.9
  Top Layer w0.254: R6.2@89.789,59.944 PB3.1@92.583,59.944 ; R6.2@90.015,59.718 cw(c90.559,59.174) 90.559,59.944 cw(c90.559,60.714) R6.2@90.015,60.17 ; R6.2@90.194,59.539 cw(c91.172,58.561) 91.172,59.944 cw(c91.172,61.327) R6.2@90.194,60.349 ; PB3.1@92.142,59.503 ccw(c91.079,58.44) 91.079,59.944 ccw(c91.079,61.448) PB3.1@92.142,60.385 ; PB3.1@92.322,59.683 ccw(c91.692,59.053) 91.692,59.944 ccw(c91.692,60.835) PB3.1@92.322,60.205
PB0: ATMEGA8L/48.14 PB0.2 PB.1 | length 80.8
  Top Layer w0.254: PB0.2@94.5,74.168 cw(c92.996,74.168) 94.059,73.104 cw(c95.123,72.041) PB0.2@95.123,73.545 ; PB0.2@94.754,74.168 cw(c93.863,74.168) 94.493,73.538 cw(c95.123,72.908) PB0.2@95.123,73.799 ; PB0.2@95.123,74.168 93.98,73.025 93.98,64.008 100.279,57.709 128.775,57.709 PB.1@130.533,59.467 119.349,59.467 ATMEGA8L/48.14@116.586,62.23 ; ATMEGA8L/48.14@116.586,61.595 cw(c116.586,60.062) 117.67,61.146 cw(c118.754,62.23) ATMEGA8L/48.14@117.221,62.23 ; ATMEGA8L/48.14@116.586,61.849 cw(c116.586,60.929) 117.236,61.58 cw(c117.887,62.23) ATMEGA8L/48.14@116.967,62.23 ; PB.1@129.91,59.467 cw(c128.406,59.467) 129.469,58.403 cw(c130.533,57.34) PB.1@130.533,58.844 ; PB.1@130.092,59.026 ccw(c129.029,57.963) 129.029,59.467 ccw(c129.029,60.971) PB.1@130.092,59.908 ; PB.1@130.164,59.467 cw(c129.273,59.467) 129.903,58.837 cw(c130.533,58.207) PB.1@130.533,59.098 ; PB.1@130.272,59.206 ccw(c129.642,58.576) 129.642,59.467 ccw(c129.642,60.358) PB.1@130.272,59.728
PB1: ATMEGA8L/48.15 PB1.2 PB.2 | length 61.6
  Top Layer w0.254: ATMEGA8L/48.15@124.206,62.23 126.873,62.23 127.096,62.007 PB.2@130.533,62.007 ; ATMEGA8L/48.15@124.475,61.961 cw(c125.126,61.31) 125.126,62.23 cw(c125.126,63.15) ATMEGA8L/48.15@124.475,62.499 ; ATMEGA8L/48.15@124.655,61.781 cw(c125.739,60.697) 125.739,62.23 cw(c125.739,63.763) ATMEGA8L/48.15@124.655,62.679 ; PB.2@130.092,61.566 ccw(c129.029,60.503) 129.029,62.007 ccw(c129.029,63.511) PB.2@130.092,62.448 ; PB.2@130.272,61.746 ccw(c129.642,61.116) 129.642,62.007 ccw(c129.642,62.898) PB.2@130.272,62.268
  Bottom Layer w0.254: PB1.2@94.5,69.596 cw(c92.996,69.596) 94.059,68.532 cw(c95.123,67.469) PB1.2@95.123,68.973 ; PB1.2@94.754,69.596 cw(c93.863,69.596) 94.493,68.966 cw(c95.123,68.336) PB1.2@95.123,69.227 ; PB1.2@95.123,69.596 93.98,68.453 93.98,64.389 95.631,62.738 104.877,62.738 109.22,58.395 120.371,58.395 ATMEGA8L/48.15@124.206,62.23 ; ATMEGA8L/48.15@123.571,62.23 cw(c122.038,62.23) 123.122,61.146 cw(c124.206,60.062) ATMEGA8L/48.15@124.206,61.595 ; ATMEGA8L/48.15@123.825,62.23 cw(c122.905,62.23) 123.556,61.58 cw(c124.206,60.929) ATMEGA8L/48.15@124.206,61.849
PB2: ATMEGA8L/48.16 PB2.2 PB.3 | length 51.8
  Top Layer w0.254: ATMEGA8L/48.16@124.206,64.77 126.746,64.77 126.969,64.547 PB.3@130.533,64.547 ; ATMEGA8L/48.16@124.475,64.501 cw(c125.126,63.85) 125.126,64.77 cw(c125.126,65.69) ATMEGA8L/48.16@124.475,65.039 ; ATMEGA8L/48.16@124.655,64.321 cw(c125.739,63.237) 125.739,64.77 cw(c125.739,66.303) ATMEGA8L/48.16@124.655,65.219 ; PB.3@130.092,64.106 ccw(c129.029,63.043) 129.029,64.547 ccw(c129.029,66.051) PB.3@130.092,64.988 ; PB.3@130.272,64.286 ccw(c129.642,63.656) 129.642,64.547 ccw(c129.642,65.438) PB.3@130.272,64.808
  Bottom Layer w0.254: PB2.2@95.123,65.024 102.743,65.024 102.997,65.278 106.68,65.278 107.569,66.167 122.809,66.167 ATMEGA8L/48.16@124.206,64.77 ; PB2.2@95.384,64.763 cw(c96.014,64.133) 96.014,65.024 cw(c96.014,65.915) PB2.2@95.384,65.285 ; PB2.2@95.564,64.583 cw(c96.627,63.52) 96.627,65.024 cw(c96.627,66.528) PB2.2@95.564,65.465 ; ATMEGA8L/48.16@123.571,64.77 ccw(c122.038,64.77) 123.122,65.854 ccw(c124.206,66.938) ATMEGA8L/48.16@124.206,65.405 ; ATMEGA8L/48.16@123.825,64.77 ccw(c122.905,64.77) 123.556,65.42 ccw(c124.206,66.071) ATMEGA8L/48.16@124.206,65.151